# Altium PCB PCB_NetworkSerialPort_2021-12-01.pcbdoc
Units mil, origin at the board's own origin, x right, y up, seen from the top; angles counter-clockwise.
Board outline 1181.1 x 1968.5 mil, 2 copper layers (Top Layer, Bottom Layer); 28 components, 31 nets, 121 pads, 95 vias.
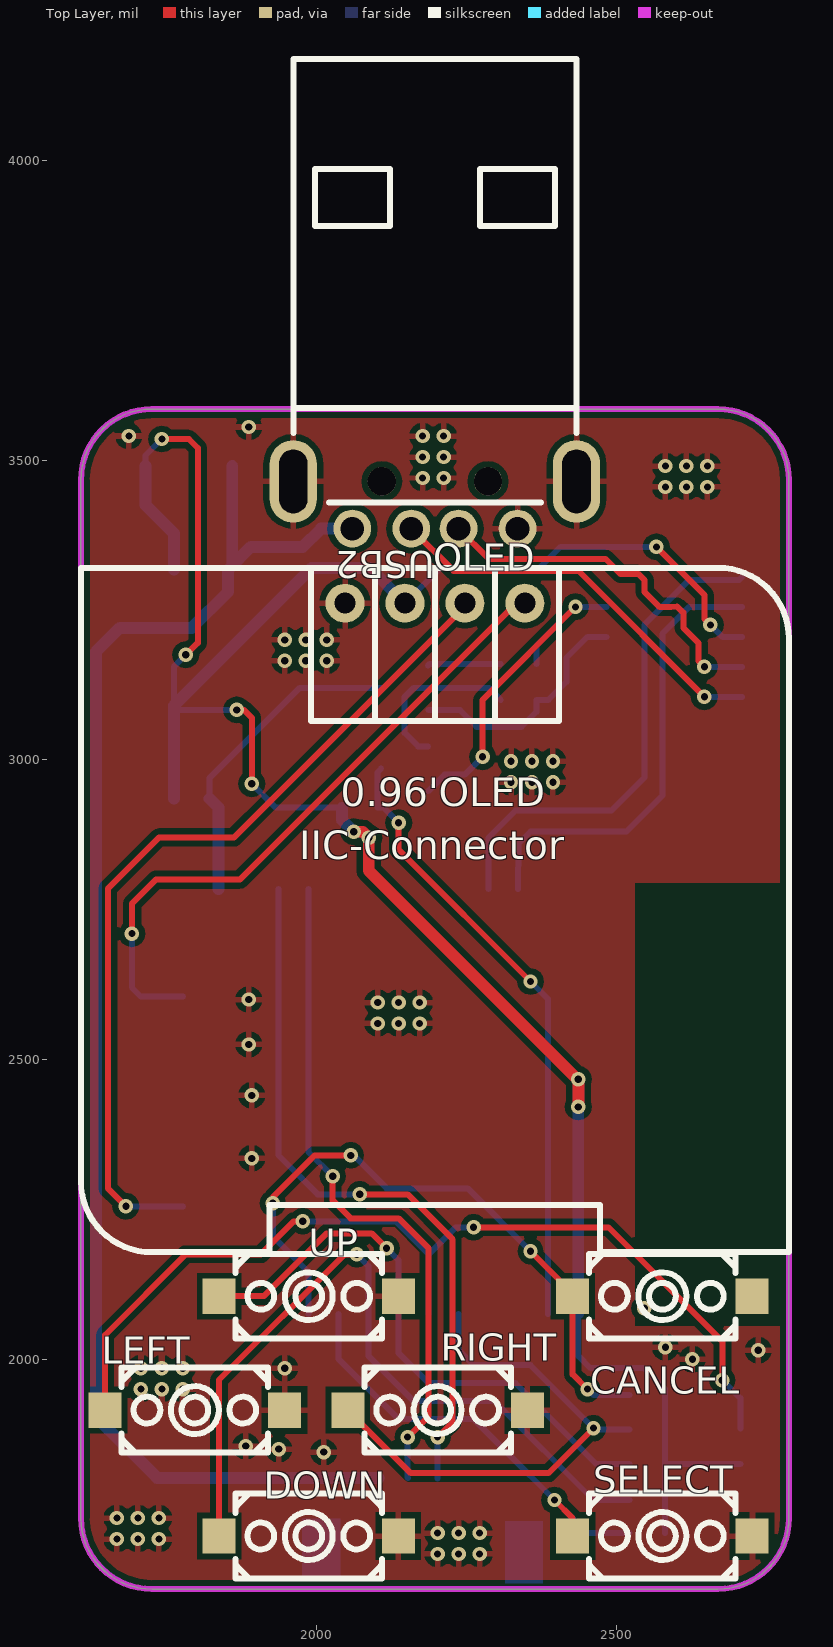
[diagram p0: Top Layer view]
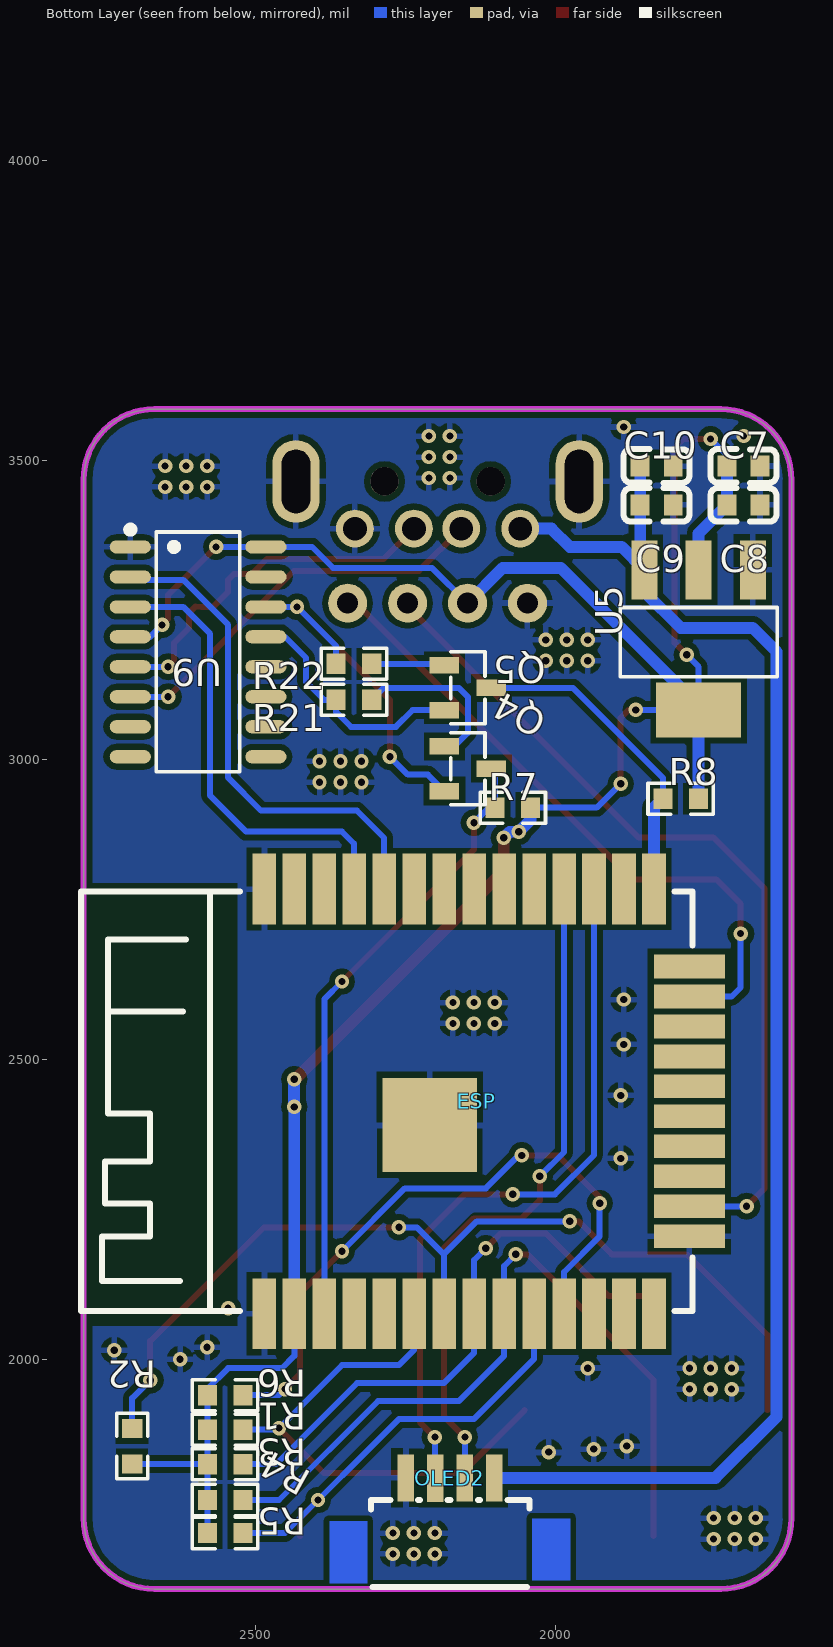
[diagram p1: Bottom Layer view, seen from below]

## Layer stack, top to bottom
Top Solder: solder mask 0.4, Solder Resist, Dk 3.5
Top Layer: signal copper 1.4
Dielectric1: dielectric 12.6, FR-4, Dk 4.8
Bottom Layer: signal copper 1.4
Bottom Solder: solder mask 0.4, Solder Resist, Dk 3.5

## Board outline
1724.41,1616.5 cw(c1724.41,1734.61) 1606.3,1734.61 1606.3,3466.89 cw(c1724.41,3466.89) 1724.41,3585 2669.29,3585 cw(c2669.29,3466.89) 2787.4,3466.89 2787.4,1734.61 cw(c2669.29,1734.61) 2669.29,1616.5

## Design rules (kind name [scope] priority, off if disabled: settings)
Clearance [All] p1: gap=10 ignorepadtopadclearanceinfootprint=FALSE except(0: Arc-Hole Track-Hole SMDPad-Hole THPad-Hole Via-Hole Fill-Hole Poly-Hole Region-Hole Text-Hole)
PolygonConnect [All] p1: connectstyle=Relief reliefconductorwidth=10 reliefentries=4 polygonreliefangle="90 Angle" airgapwidth=10
RoutingVias [All] p1: holewidth=28 width=50 viastyle="Through Hole" minholewidth=28 minwidth=50 maxholewidth=28 maxwidth=50
SolderMaskExpansion [All] p1: expansion=4 istentingtop=FALSE
Width [All] p1: maxlimit=10 minlimit=10 preferedwidth=10
30 further rules are at their usual default settings.

## Components (designator, comment, footprint, x,y, rotation, side; value= is the part's Value field where it differs from the comment)
C7 "22u" C0603 1686.3,3490 r0 bottom
C8 "0.1u" C0603 1686.3,3425 r0 bottom
C9 "22u" C0603 1831.3,3425 r0 bottom
C10 "0.1u" C0603 1831.3,3490 r0 bottom
CANCEL "K2-3.6×6.1_SMD" KEY-SMD_2P-L6.2-W3.6-LS8.0 2576.3,2105 r0 top
DOWN "K2-3.6×6.1_SMD" KEY-SMD_2P-L6.2-W3.6-LS8.0 1986.3,1705 r0 top
ESP "ESP32-S" WIRELM-SMD_ESP32-S 2131.3,2430 r270 bottom
LEFT "K2-3.6×6.1_SMD" KEY-SMD_2P-L6.2-W3.6-LS8.0 1796.3,1915 r0 top
OLED "0.96OLED_4P" 0.96OLED_4P 2196.85,3261.1 r0 top
OLED2 "1.25T-4P-WT" CONN-SMD_4P-1.25P_1.25T-4P 2176.3,1740 r180 bottom
Q4 "MMUN2233LT1G" SOT-23-3_L2.9-W1.3-P1.90-LS2.4-BR 2146.3,2985 r180 bottom
Q5 "MMUN2233LT1G" SOT-23-3_L2.9-W1.3-P1.90-LS2.4-BR 2146.3,3120 r180 bottom
R1 "1k" R0603 2551.3,1882.5 r180 bottom
R2 "1k" R0603 2706.3,1855 r90 bottom
R3 "1k" R0603 2551.3,1825 r180 bottom
R4 "1k" R0603 2551.3,1765 r180 bottom
R5 "1k" R0603 2551.3,1710 r180 bottom
R6 "1k" R0603 2551.3,1940 r180 bottom
R7 "1k" R0603 2071.3,2920 r0 bottom
R8 "1k" R0603 1791.3,2935 r0 bottom
R21 "10K" R0603 2336.3,3100 r0 bottom
R22 "10K" R0603 2336.3,3160 r0 bottom
RIGHT "K2-3.6×6.1_SMD" KEY-SMD_2P-L6.2-W3.6-LS8.0 2201.3,1915 r0 top
SELECT "K2-3.6×6.1_SMD" KEY-SMD_2P-L6.2-W3.6-LS8.0 2576.3,1705 r0 top
U5 "AMS1117-3.3" SOT-223-3_L6.5-W3.4-P2.30-LS7.0-BR 1761.3,3200 r270 bottom
U9 "CH340C" SOP-16_L10.0-W3.9-P1.27-LS6.0-BL 2596.3,3180 r90 bottom
UP "K2-3.6×6.1_SMD" KEY-SMD_2P-L6.2-W3.6-LS8.0 1986.3,2105 r0 top
USB2 "USB-Type A_Male" USB-A-TH_48037-0001 2196.85,3425 r180 top

## Footprints (in the part's own frame and the unit in brackets; to place one, negate y for a bottom-side part, rotate by r counter-clockwise, add the part's x,y. Pads: shape width x height; smd on the part's side, far side on the other; paste and mask are expansions set on the pad)
0.96OLED_4P [mm]
  round 1.65 hole 0.89: 1(-3.81,-0.001) 2(-1.27,0.002) 3(1.27,0.002) 4(3.81,0.002)
  silkscreen extent -15,-27.5 15,1.5
C0603 [mm]
  rect 0.8x0.9 smd: 1(0.7,0) 2(-0.7,0)
  silkscreen extent -1.39,-0.72 1.41,0.71
CONN-SMD_4P-1.25P_1.25T-4P [mm]
  rect 0.7x2 smd: 1(1.875,1.571) 2(0.625,1.571) 3(-0.625,1.556) 4(-1.875,1.574)
  Top Layer region: -5.1,-0.264 -3.5,-0.264 -3.5,-2.884 -5.1,-2.884
  Top Layer region: 5.1,-2.773 3.5,-2.773 3.5,-0.153 5.1,-0.153
  silkscreen extent -3.34,-3.06 3.37,0.64
KEY-SMD_2P-L6.2-W3.6-LS8.0 [mm]
  rect 1.4x1.5 smd: 1(-3.8,0) 2(3.8,0)
  silkscreen extent -3.1,-1.8 3.1,1.8
R0603 [mil]
  rect 31.75x34.02 smd: 1(29.66,0) 2(-29.66,0)
  silkscreen extent -55,-26 55,26
SOP-16_L10.0-W3.9-P1.27-LS6.0-BL [mm]
  oval 0.56x1.745 smd: 1(4.445,2.873) 2(3.175,2.873) 3(1.905,2.873) 4(0.635,2.873) 5(-0.635,2.873) 6(-1.905,2.873) 7(-3.175,2.873) 8(-4.445,2.873) 9(-4.445,-2.873) 10(-3.175,-2.873) 11(-1.905,-2.873) 12(-0.635,-2.873) 13(0.635,-2.873) 14(1.905,-2.873) 15(3.175,-2.873) 16(4.445,-2.873)
  silkscreen extent -5.08,-1.77 5.33,3.02
SOT-23-3_L2.9-W1.3-P1.90-LS2.4-BR [mm]
  rect 1.25x0.7 smd: 1(-1,0.95) 2(-1,-0.95) 3(1,0)
  silkscreen extent -0.73,-1.53 0.73,1.53
SOT-223-3_L6.5-W3.4-P2.30-LS7.0-BR [mm]
  rect 2.5x1.1 smd: 1(-2.97,2.3) 2(-2.97,0) 3(-2.97,-2.3)
  rect 2.34x3.6 smd: 4(2.97,0)
  silkscreen extent -1.37,-3.33 1.57,3.33
USB-A-TH_48037-0001 [mm]
  round 1.6 hole 1: 1(3.5,1) 2(1,1) 3(-1,1) 4(-3.5,1)
  oval 2x3.5 hole 1.2 slot 2.7 at 90 deg: 5(-6,-1) 6(6,-1)
  round 1.2 hole 1.2 unplated: ""(-2.25,-1) ""(2.25,-1)
  Keep-Out Layer lines w0.254: 6.096,-4.064 -6.096,-4.064
  silkscreen extent -6,-18.9 6,-0.1
WIRELM-SMD_ESP32-S [mm]
  rect 3x1 smd: 1(9,-9.005) 2(9,-7.735) 3(9,-6.465) 4(9,-5.195) 5(9,-3.925) 6(9,-2.655) 7(9,-1.385) 8(9,-0.115) 9(9,1.155) 10(9,2.425) 11(9,3.695) 12(9,4.965) 13(9,6.235) 14(9,7.505) 25(-9,7.505) 26(-9,6.235) 27(-9,4.965) 28(-9,3.695) 29(-9,2.425) 30(-9,1.155) 31(-9,-0.115) 32(-9,-1.385) 33(-9,-2.655) 34(-9,-3.925) 35(-9,-5.195) 36(-9,-6.465) 37(-9,-7.735) 38(-9,-9.005)
  rect 1x3 smd: 15(5.715,9.005) 16(4.445,9.005) 17(3.175,9.005) 18(1.905,9.005) 19(0.635,9.005) 20(-0.635,9.005) 21(-1.905,9.005) 22(-3.175,9.005) 23(-4.445,9.005) 24(-5.715,9.005)
  rect 4x4 smd: 39(1,-1.995)
  silkscreen extent -8.89,-16.78 8.89,9.13

## Via types
v1: diameter 24, hole 12, Top Layer to Bottom Layer, 95 vias

## Nets (pads, with @x,y where several pads share a name; then routed paths per layer and width w, separated by ;. In a path a pad name is that pad's centre, name@x,y a point inside that pad or via, vN(x,y) a via of type N, cw(c..) or ccw(c..) an arc to the next point about the centre after c; other vN are vias at no path point)
+3.3V: C7.1 C8.1 ESP.2 OLED.2 R1.2 R2.2 R3.2 R4.2 R5.2 R6.2 R7.2 R8.2 U5.2 U5.4 U9.4 U9.16 | length 4344.4
  Top Layer w10: v1(1741.3,3535) 1786.3,3535 1801.3,3520 1801.3,3195 v1(1781.3,3175) ; v1(1866.3,3083.07) 1878.2,3083.1 1891.3,3070 v1(1891.3,2960) ; v1(2566.3,3355) 2646.3,3275 2646.3,3235 v1(2656.3,3225)
  Top Layer w19.68: v1(2061.3,2880) 2076.3,2880 v1(2086.3,2870) 2086.3,2815 2436.3,2465 2436.3,2421.38 v1(2435.83,2420.91)
  Bottom Layer w10: C7.1 1713.86,3507.56 v1(1741.3,3535) ; v1(1781.3,3175) 1761.3,3155 U5.4 v1(1866.3,3083.07) ; v1(1891.3,2960) 1931.3,2920 R7.2 ; OLED.2@2146.9,3261.2 2206.3,3320 2371.3,3320 2406.3,3355 U9.16 v1(2566.3,3355) ; ESP.2 2435.8,2005.5 2456.3,1985 2546.3,1985 2581,1950.3 R6.2 ; R5.2 R3.2 ; R6.2 R1.2 R4.2 R3.2 ; v1(2656.3,3225) 2676.3,3205 U9.4 ; R2.2 2651.64,1825.34 2651.3,1825 R3.2
  Bottom Layer w19.68: C7.1 C8.1 1761.3,3377.56 U5.2 ; R8.2 U5.4 1761.3,3090 1991.3,3320 2088,3320 OLED.2@2146.9,3261.2 ; R7.2 2041.64,2899.66 v1(2061.3,2880) 2076.3,2880 v1(2086.3,2870) ; ESP.2 v1(2435.83,2420.91) 2436.3,2421.38 2436.3,2465 2436.3,2466.44 v1(2435.83,2466.91)
+5V: C9.1 C10.1 OLED2.1 U5.3 USB2.1 | length 2499.9
  Bottom Layer w19.68: U5.3 1858.86,3323.93 C9.1 C10.1 ; USB2.1 2006.9,3385.6 1976.3,3355 1889.9,3355 U5.3 1851.8,3280.5 1791.3,3220 1671.3,3220 1631.3,3180 1631.3,1903.7 1733.2,1801.9 OLED2.1
CANCEL: CANCEL.1 ESP.11 R6.1 | length 1088
  Top Layer w10: v1(1926.3,2260) 1926.3,2270 1996.3,2340 v1(2056.3,2340) ; v1(2356.3,2180) 2426.7,2109.6 CANCEL.1 2426.7,1974.6 v1(2451.3,1950)
  Bottom Layer w10: v1(1926.3,2260) 1926.3,2205 1985.8,2145.5 ESP.11 ; v1(2056.3,2340) 2061.3,2340 2116.3,2285 2251.3,2285 v1(2356.3,2180) ; v1(2451.3,1950) 2461.3,1940 R6.1
D+: U9.5 USB2.3 | length 612.9
  Top Layer w10: USB2.3 2286.9,3335 2481.3,3335 2506.3,3310 2536.3,3310 2546.3,3300 2546.3,3280 2571.3,3255 2590.9,3255 2601,3255.3 2611.3,3245.5 2611.3,3220 2636.3,3195 2636.3,3165 v1(2646.3,3155)
  Bottom Layer w10: v1(2646.3,3155) U9.5
D-: U9.6 USB2.2 | length 668.1
  Top Layer w10: USB2.2 2228.1,3315 2436.3,3315 v1(2646.3,3105)
  Bottom Layer w10: v1(2646.3,3105) U9.6
DOWN: DOWN.1 ESP.9 R4.1 | length 1289.8
  Top Layer w10: DOWN.1 1836.7,1965.4 2046.3,2175 v1(2066.3,2175)
  Bottom Layer w10: v1(2066.3,2175) 2085.8,2155.5 ESP.9 2085.8,2005.5 2161.3,1930 2296.3,1930 2461.3,1765 R4.1
DTR: Q5.2 R21.1 U9.13 | length 406.4
  Bottom Layer w10: Q5.2 2238.7,3082.6 2266.3,3055 2341.3,3055 2366,3079.7 R21.1 2386.3,3100 2416.3,3130 2416.3,3170 2451.3,3205 U9.13
EN: ESP.3 Q4.3 R7.1 | length 1035.9
  Top Layer w10: v1(2136.3,2895) 2136.3,2850 v1(2356.3,2630)
  Bottom Layer w10: Q4.3 2100.96,2979.03 R7.1 2111.3,2920 v1(2136.3,2895) ; v1(2356.3,2630) 2385.83,2600.47 ESP.3
ESP32-RX: ESP.34 U9.2 | length 838.6
  Bottom Layer w10: ESP.34 2285.8,2869.5 2331.3,2915 2491.3,2915 2546.3,2970 2546.3,3225 2621.3,3300 2704.4,3300 U9.2
ESP32-TX: ESP.35 U9.3 | length 770.6
  Bottom Layer w10: ESP.35 2336.3,2860 2356.3,2880 2516.3,2880 2576.3,2940 2576.3,3210 2621.3,3255 U9.3
ESP_12: ESP.12
ESP_13: ESP.13
ESP_14: ESP.14
ESP_26: ESP.26
ESP_30: ESP.30
ESP_31: ESP.31
GND: C7.2 C8.2 C9.2 C10.2 CANCEL.2 DOWN.2 ESP.1 ESP.15 ESP.38 ESP.39 LEFT.2 OLED2.4 OLED.1 RIGHT.2 SELECT.2 U5.1 U9.1 UP.2 USB2.4 USB2.5 USB2.6
  other v1: 2201.3,1675 2236.3,1675 2271.3,1675 1666.3,1700 1701.3,1700 1736.3,1700 2201.3,1710 2236.3,1710 2271.3,1710 1666.3,1735 1701.3,1735 1736.3,1735 2011.3,1845 1936.3,1850 1881.3,1855 1706.3,1950 1741.3,1950 1776.3,1950 1706.3,1985 1741.3,1985 1776.3,1985 1946.3,1985 2626.3,2000 2736.3,2015 2581.3,2020 2546.3,2085 1891.3,2335 1891.3,2440 1886.3,2525 2101.3,2560 2136.3,2560 2171.3,2560 2101.3,2595 2136.3,2595 2171.3,2595 1886.3,2600 2323.76,2962.46 2358.76,2962.46 2393.76,2962.46 2323.76,2997.46 2358.76,2997.46 2393.76,2997.46 1946.3,3165 1981.3,3165 2016.3,3165 1946.3,3200 1981.3,3200 2016.3,3200 2581.3,3455 2616.3,3455 2651.3,3455 2176.3,3470 2211.3,3470 2581.3,3490 2616.3,3490 2651.3,3490 2176.3,3505 2211.3,3505 1686.3,3540 2176.3,3540 2211.3,3540 1886.3,3555
IO0: ESP.25 Q5.3 R8.1 | length 539.7
  Bottom Layer w10: R8.1 1821,2969.7 1971.3,3120 Q5.3
  Bottom Layer w19.68: R8.1@1820.95,2935 1835.83,2920.12 ESP.25
LEFT: ESP.7 LEFT.1 R2.1 | length 1710.3
  Top Layer w10: LEFT.1 1646.7,2040.4 1781.3,2175 1906.3,2175 1961.3,2230 v1(1976.3,2230) ; v1(2261.3,2220) 2486.3,2220 2676.3,2030 v1(2676.3,1965)
  Bottom Layer w10: v1(1976.3,2230) 2131.3,2230 2186.3,2175 ESP.7@2186.3,2075.67 ; ESP.7 2185.8,2174.5 2231.3,2220 v1(2261.3,2220) ; v1(2676.3,1965) 2706.3,1935 R2.1
OLED2_5: 
OLED2_6: 
R21_2: Q4.1 R21.2 | length 283.6
  Bottom Layer w10: Q4.1 2168.9,3022.4 2146.3,3045 2146.3,3105 2161.3,3120 2286.64,3120 R21.2
R22_2: Q5.1 R22.2 | length 122
  Bottom Layer w10: Q5.1 2188.27,3160 R22.2
RIGHT: ESP.6 R1.1 RIGHT.1 | length 885.2
  Top Layer w10: RIGHT.1 2156.7,1810 2386.3,1810 v1(2461.3,1885)
  Bottom Layer w10: ESP.6 2235.8,2015.5 2261.3,1990 2356.3,1990 2463.8,1882.5 R1.1
RTS: Q4.2 R22.1 U9.14 | length 602.6
  Top Layer w10: v1(2276.3,3005) 2276.3,3100 v1(2431.3,3255)
  Bottom Layer w10: Q4.2 2213.07,2975 2246.3,2975 v1(2276.3,3005) ; R22.1@2365.95,3160 2365.95,3189.65 v1(2431.3,3255) U9.14
SCL: ESP.16 OLED.3 | length 1433.9
  Top Layer w10: v1(1681.3,2255) 1651.3,2285 1651.3,2785 1736.3,2870 1861.3,2870 2246.8,3255.5 OLED.3@2246.8,3261.1
  Bottom Layer w10: v1(1681.3,2255) ESP.16
SDA: ESP.23 OLED.4 | length 1094.8
  Top Layer w10: v1(1691.3,2710) 1691.3,2760 1731.3,2800 1871.3,2800 2332.45,3261.15 OLED.4
  Bottom Layer w10: v1(1691.3,2710) 1691.3,2620 1706.3,2605 ESP.23
SELECT: ESP.10 R5.1 SELECT.1 | length 753.9
  Top Layer w10: v1(2396.3,1765) 2426.7,1734.6 SELECT.1
  Bottom Layer w10: ESP.10 2035.8,2000.5 2136.3,1900 2261.3,1900 2451.3,1710 R5.1
SERIAL2_RX: ESP.27 OLED2.3 | length 1201.8
  Top Layer w10: v1(2071.3,2275) 2151.3,2275 2226.3,2200 2226.3,1895 v1(2201.3,1870)
  Bottom Layer w10: ESP.27 1935.83,2340.47 2001.3,2275 v1(2071.3,2275) ; OLED2.3 2200.9,1869.6 v1(2201.3,1870)
SERIAL2_TX: ESP.28 OLED2.2 | length 1127
  Top Layer w10: v1(2026.3,2305) 2026.3,2265 2056.3,2235 2136.3,2235 2186.3,2185 2186.3,1905 v1(2151.3,1870)
  Bottom Layer w10: ESP.28 1985.83,2345.47 v1(2026.3,2305) ; v1(2151.3,1870) 2151.3,1802.24 OLED2.2
UP: ESP.8 R3.1 UP.1 | length 978.7
  Top Layer w10: UP.1 1911.3,2105 2016.3,2210 2091.3,2210 v1(2116.3,2185)
  Bottom Layer w10: v1(2116.3,2185) 2135.83,2165.47 ESP.8 ; ESP.8 2135.8,2010.5 2186.3,1960 2331.3,1960 2466.3,1825 R3.1
pads on no net: ESP.4 ESP.5 ESP.17 ESP.18 ESP.19 ESP.20 ESP.21 ESP.22 ESP.24 ESP.29 ESP.32 ESP.33 ESP.36 ESP.37 U9.7 U9.8 U9.9 U9.10 U9.11 U9.12 U9.15 USB2.

## Polygon pours and split planes (outlines as drawn)
GND on Top Layer "Top Layer-No Net" (solid, pour order 0): 1724.41,1616.5 cw(c1724.41,1734.61) 1606.3,1734.61 1606.3,3466.89 cw(c1724.41,3466.89) 1724.41,3585 2669.29,3585 cw(c2669.29,3466.89) 2787.4,3466.89 2787.4,1734.61 cw(c2669.29,1734.61) 2669.29,1616.5
GND on Bottom Layer "Top Layer-No Net1" (solid, pour order 1): 1724.41,1616.5 cw(c1724.41,1734.61) 1606.3,1734.61 1606.3,3466.89 cw(c1724.41,3466.89) 1724.41,3585 2669.29,3585 cw(c2669.29,3466.89) 2787.4,3466.89 2787.4,1734.61 cw(c2669.29,1734.61) 2669.29,1616.5

## Keep-outs
Keep-Out Layer:
  lines w10: 1606.3,1734.61 ccw(c1724.41,1734.61) 1724.41,1616.5 ; 1606.3,3466.89 cw(c1724.41,3466.89) 1724.41,3585 ; 2669.29,1616.5 ccw(c2669.29,1734.61) 2787.4,1734.61 ; 2669.29,3585 cw(c2669.29,3466.89) 2787.4,3466.89

## Other copper
Top Layer:
  pour cut-out: 2530,2795 2530,2055 2785,2055 2785,2795
Bottom Layer:
  pour cut-out: 2530,2795 2530,2055 2785,2055 2790,2060 2790,2795

## Text inside footprints (layer, text, board x,y; h text height)
OLED: Top Overlay "IIC-Connector" at 1970.25,2834.04 h47.24; Top Overlay "0.96'OLED" at 2039.45,2922.53 h47.24